# EAGLE board check_battery-board (EAGLE 9.5.2)
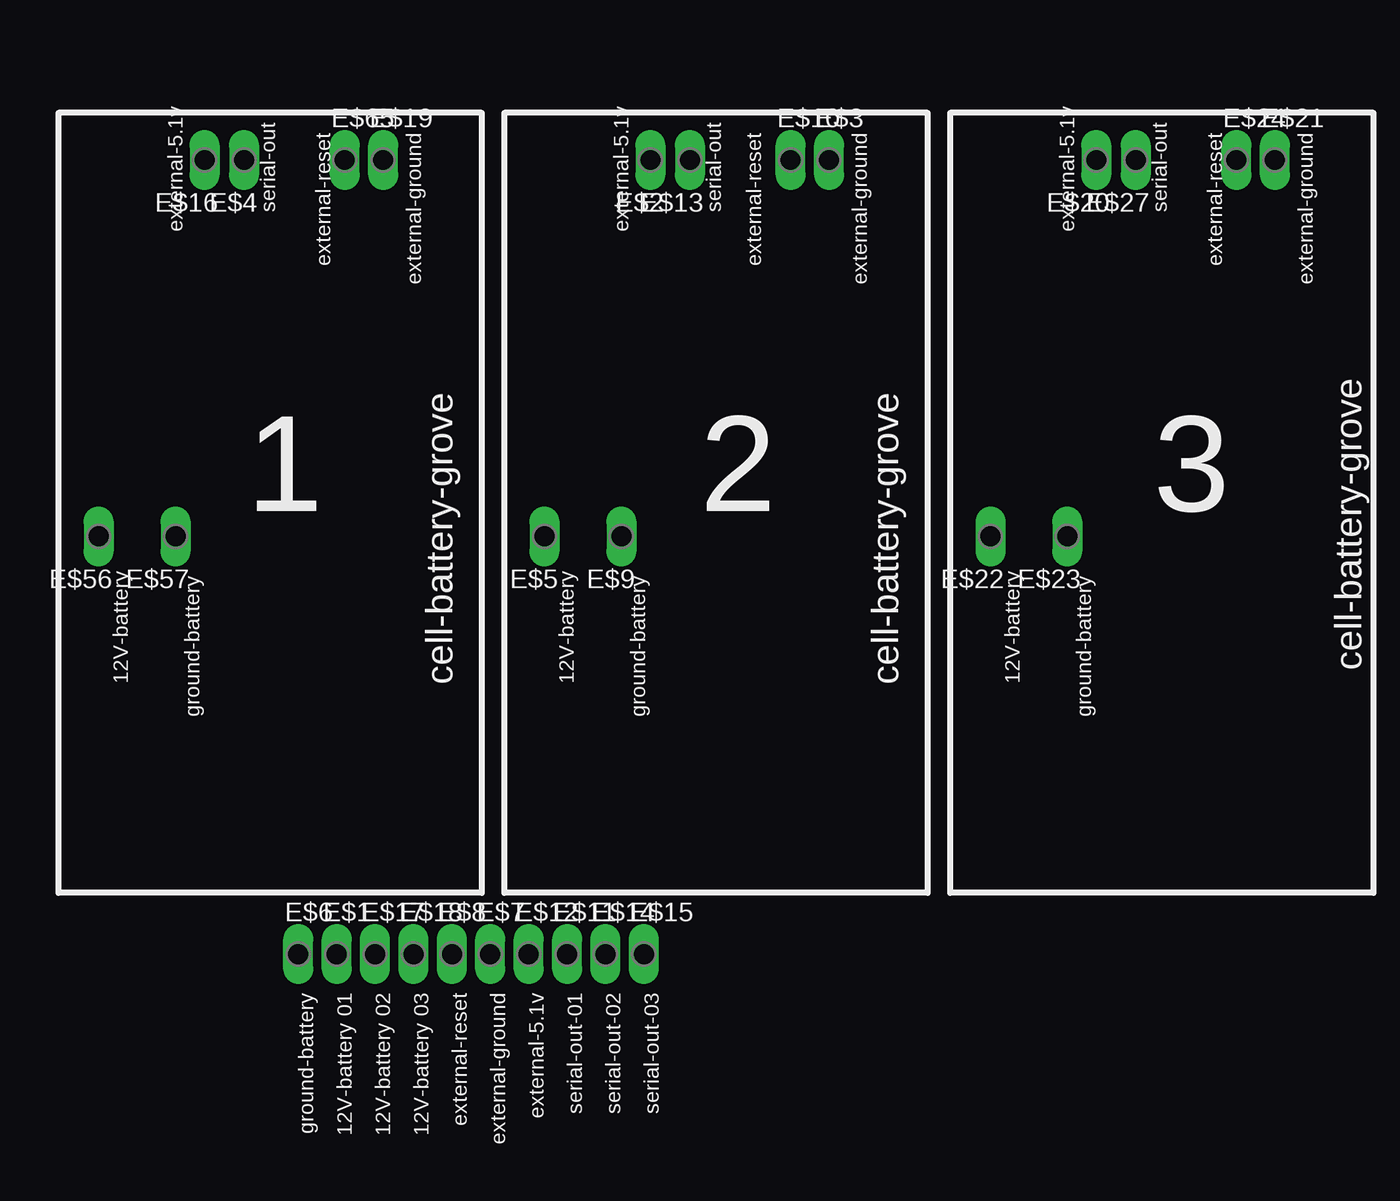
[diagram p0: board, top side]
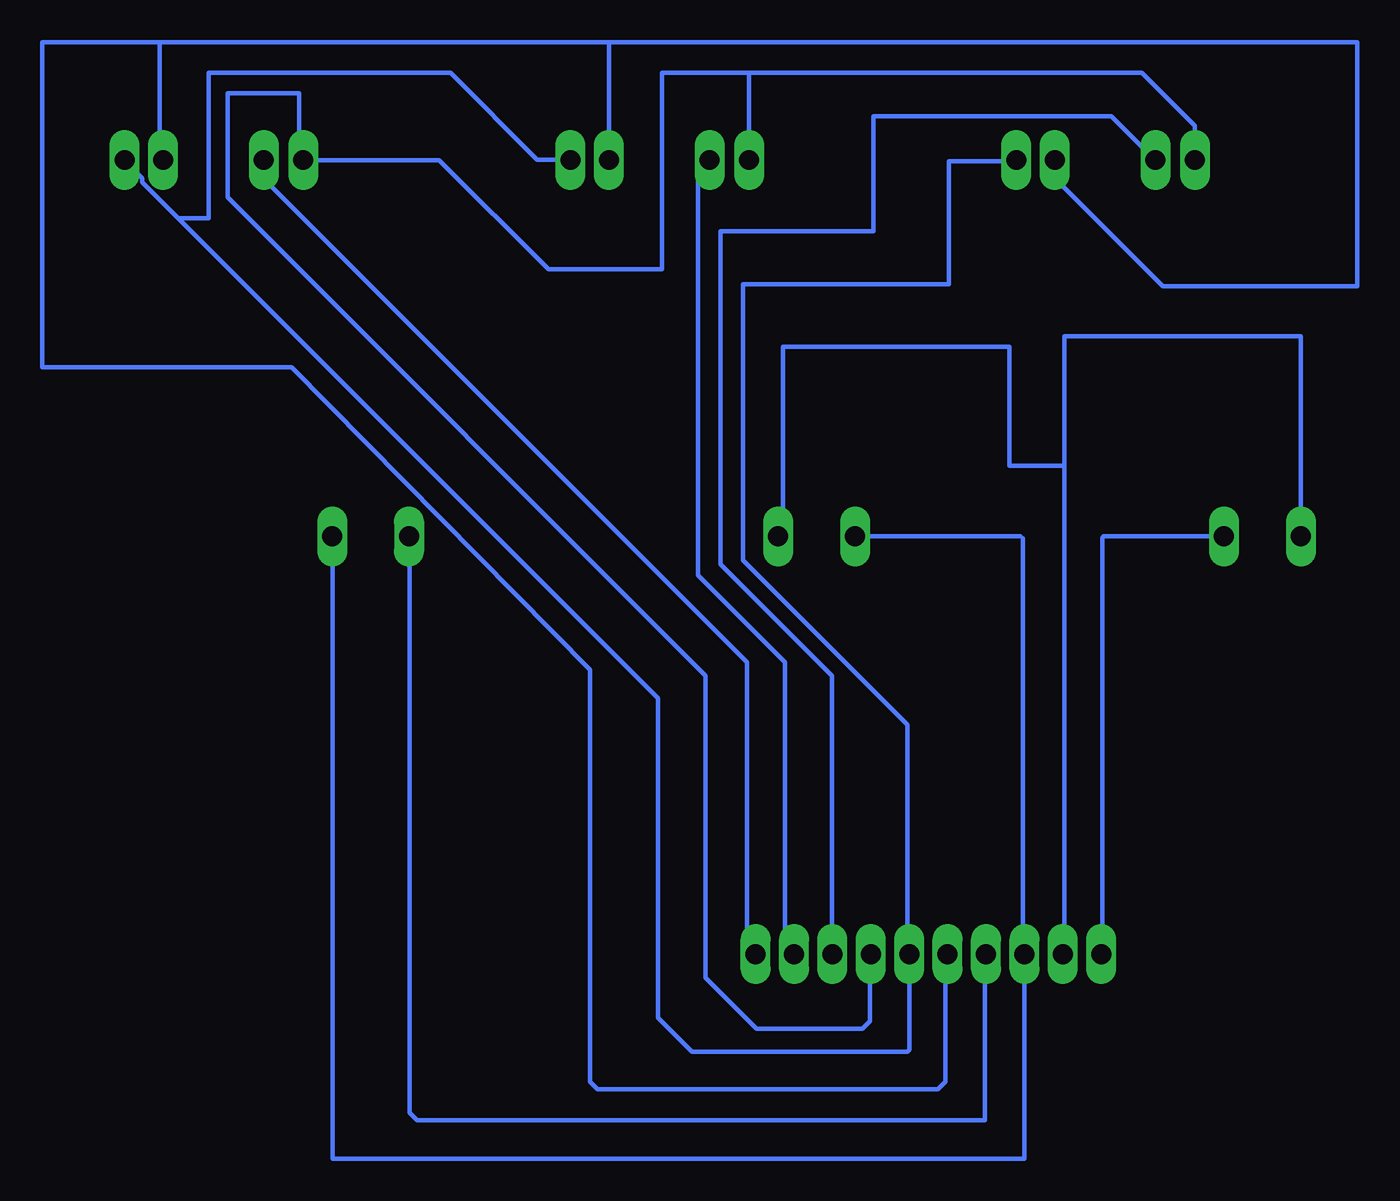
[diagram p1: board, bottom side, seen from below]

No outline drawn. Coordinates in mm, seen from the top.
Copper layers (1*16): Top 0.035mm / dielectric 1.5mm / Bottom 0.035mm
Design rules "for_pcb_garage *": minimum track width 0.3mm, minimum drill 0.35mm, track to track 6mil, track to pad 6mil, pad to pad 6mil, via to via 6mil, smd to smd 6mil, copper to edge 0.1mm, drill to drill 6mil, minimum pad ring 10mil, minimum via ring 8mil, stop-mask expansion 4mil, vias tented up to drill 0mil, thermal gap 10mil

## Footprints (pad centres in the part's own frame; a part is rotated, then mirrored left to right if it is on the bottom)
P1-13Y = drill 1.321 pad 1.905 long: TP 0,0

## Placement (x,y rotation side)
E$1  in-ground  [P1-13Y]  30.48,12.7 0 top
E$2  [P1-13Y]  51.23,65.22 180 top
E$3  in-ground  [P1-13Y]  63.05,65.22 0 top
E$4  SERIAL OUT  [P1-13Y]  24.35,65.22 180 top
E$5  [P1-13Y]  44.23,40.32 180 top
E$6  [P1-13Y]  27.94,12.7 0 top
E$7  in-ground  [P1-13Y]  40.64,12.7 0 top
E$8  [P1-13Y]  38.1,12.7 0 top
E$9  [P1-13Y]  49.31,40.32 180 top
E$10  [P1-13Y]  60.51,65.22 0 top
E$11  in-ground  [P1-13Y]  45.72,12.7 0 top
E$12  [P1-13Y]  43.18,12.7 0 top
E$13  SERIAL OUT  [P1-13Y]  53.85,65.22 180 top
E$14  in-ground  [P1-13Y]  48.26,12.7 0 top
E$15  in-ground  [P1-13Y]  50.8,12.7 0 top
E$16  [P1-13Y]  21.73,65.22 180 top
E$17  in-ground  [P1-13Y]  33.02,12.7 0 top
E$18  in-ground  [P1-13Y]  35.56,12.7 0 top
E$19  in-ground  [P1-13Y]  33.55,65.22 0 top
E$20  [P1-13Y]  80.73,65.22 180 top
E$21  in-ground  [P1-13Y]  92.55,65.22 0 top
E$22  [P1-13Y]  73.73,40.32 180 top
E$23  [P1-13Y]  78.81,40.32 180 top
E$24  [P1-13Y]  90.01,65.22 0 top
E$27  SERIAL OUT  [P1-13Y]  83.35,65.22 180 top
E$56  [P1-13Y]  14.73,40.32 180 top
E$57  [P1-13Y]  19.81,40.32 180 top
E$65  [P1-13Y]  31.01,65.22 0 top

## Library data of the parts
E$1-E$24 E$27 E$56 E$57 E$65 = testpad

## Nets
S$2: E$6.TP E$57.TP
S$4: E$1.TP E$9.TP E$56.TP
S$5: E$5.TP E$17.TP E$23.TP
S$7: E$18.TP E$22.TP
S$8: E$2.TP E$12.TP E$16.TP E$20.TP
S$9: E$4.TP E$11.TP
S$10: E$13.TP E$14.TP
S$11: E$15.TP E$27.TP
S$12: E$8.TP E$10.TP E$24.TP E$65.TP
S$13: E$3.TP E$7.TP E$19.TP E$21.TP

## Tracks (layer width: path | path; a pad name or v marks a point on that pad's centre or on a via)
S$2
  Bottom 0.3: E$57.TP 27.8,40.32 27.88,40.25 27.88,12.75 E$6.TP
S$4
  Bottom 0.3: 30.38,45 30.38,53.56 14.73,53.56 E$56.TP | 30.38,45 30.38,12.75 E$1.TP | E$9.TP 49.31,41.31 49,41.71 49,52.88 34,52.88 34,45 30.38,45
S$5
  Bottom 0.3: E$5.TP 33.29,40.32 33.12,40.21 33.12,12.75 E$17.TP 33.02,-0.83 78.79,-0.83 78.79,40.3 E$23.TP
S$7
  Bottom 0.3: E$22.TP 73.69,40.28 73.69,2.21 73.2,1.71 35.62,1.71 35.62,12.62 E$18.TP
S$8
  Bottom 0.3: 25.25,71 21.75,67.5 21.75,65.25 E$16.TP | E$12.TP 43.25,12.62 43.25,8.25 43.75,7.75 50.75,7.75 54.12,11.12 54.12,31.12 85.75,62.75 85.75,69.62 81,69.62 81,65.5 80.75,65.25 E$20.TP 71.73,65.22 64.51,58 57,58 57,71
  Bottom 0.305: 57,71 51.23,71 | 51.23,71 E$2.TP | 51.23,71 25.25,71
S$9
  Bottom 0.3: E$11.TP 45.75,12.75 45.75,31.12 53.12,38.5 53.12,60.5 43,60.5 43,68.12 27.25,68.12 24.38,65.25 E$4.TP
S$10
  Bottom 0.3: E$13.TP 54.62,64.45 54.62,37.75 48.88,32 48.88,12.97 E$14.TP
S$11
  Bottom 0.3: E$27.TP 83.12,65 83.12,63.75 51.38,32 51.38,13.08 E$15.TP
S$12
  Bottom 0.3: E$65.TP 31.01,64.01 23.88,56.88 11,56.88 11,73 60.51,73 | E$8.TP 38.12,12.62 38.25,12.5 38.25,4.25 38.75,3.75 61.25,3.75 61.75,4.25 61.75,31.5 81.5,51.5 98,51.5 98,73 90.25,73 90.25,65.38 90.12,65.25 E$24.TP | 60.51,73 E$10.TP | 85,73 60.51,73
  Bottom 0.305: 85,73 90.25,73
S$13
  Bottom 0.3: 89,61.38 87,61.38 87,71 71,71 65.25,65.25 63.12,65.25 E$3.TP | 89,61.38 91.38,63.75 91.38,64 92.5,65.12 E$21.TP | E$19.TP 33.62,65.12 38,65.12 38,57 51.62,57 51.62,38.75 40.75,27.88 40.75,12.75 E$7.TP 40.64,6.36 40.75,6.25 55,6.25 57.25,8.5 57.25,29.62 89,61.38

## Text on the board
tPlace: external-reset | external-ground | external-reset | external-ground | external-reset | external-ground | serial-out | serial-out | serial-out | external-5.1v | external-5.1v | external-5.1v | cell-battery-grove | cell-battery-grove | cell-battery-grove | 1 | 2 | 3 | 12V-battery | ground-battery | 12V-battery | ground-battery | 12V-battery | ground-battery | ground-battery | 12V-battery 01 | 12V-battery 02 | 12V-battery 03 | external-reset | external-ground | external-5.1v | serial-out-01 | serial-out-02 | serial-out-03